# EAGLE board 010 (EAGLE 9.6.2), part 1 of 2
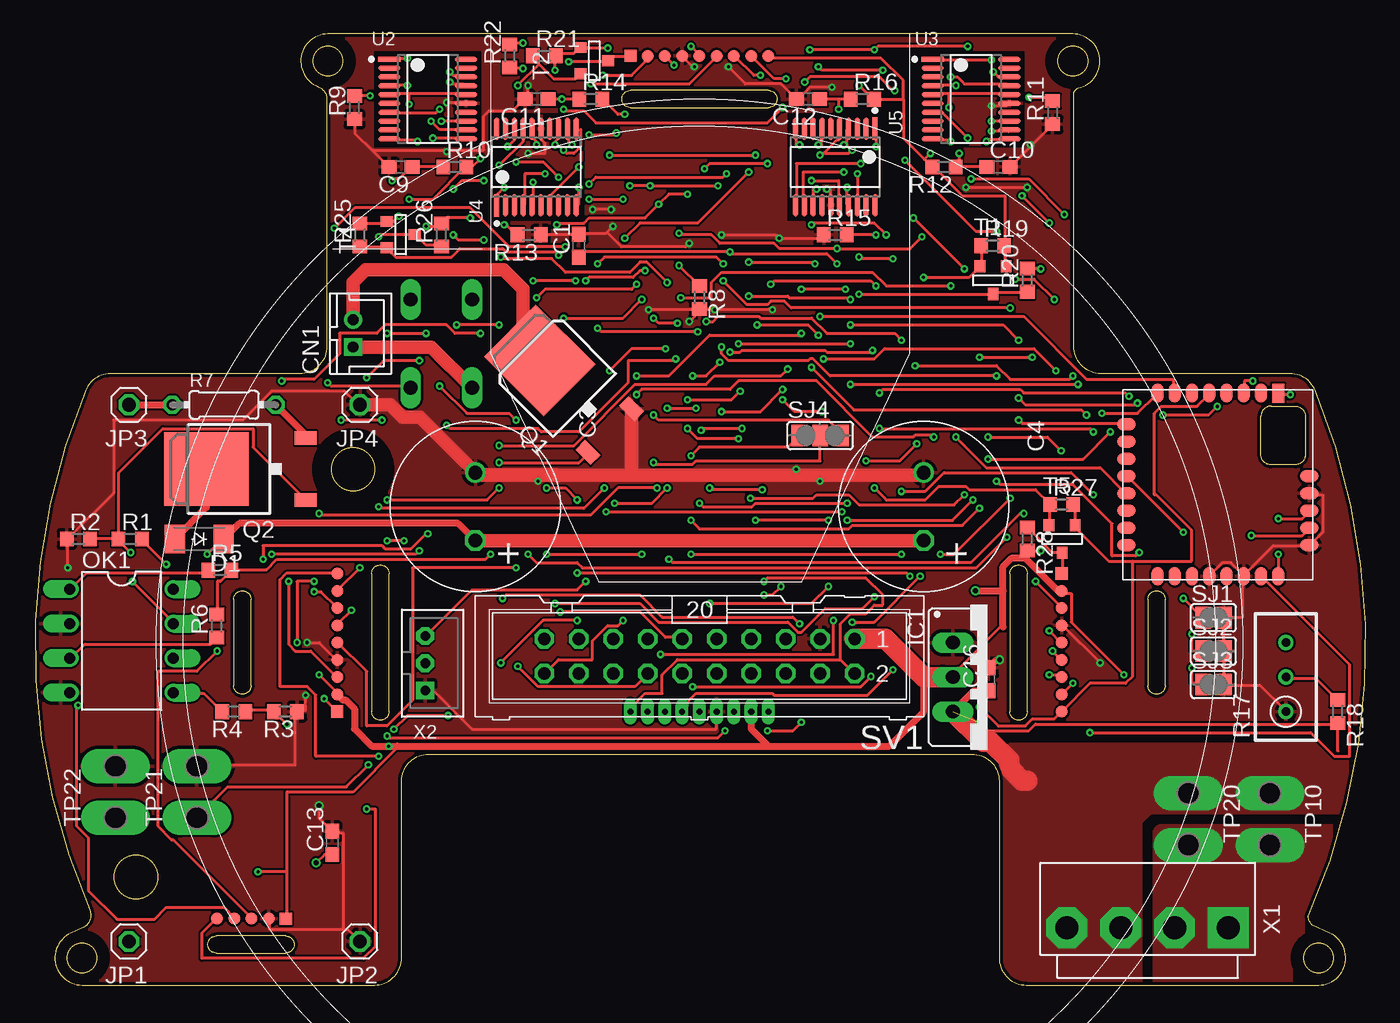
[diagram p0: board, top side]
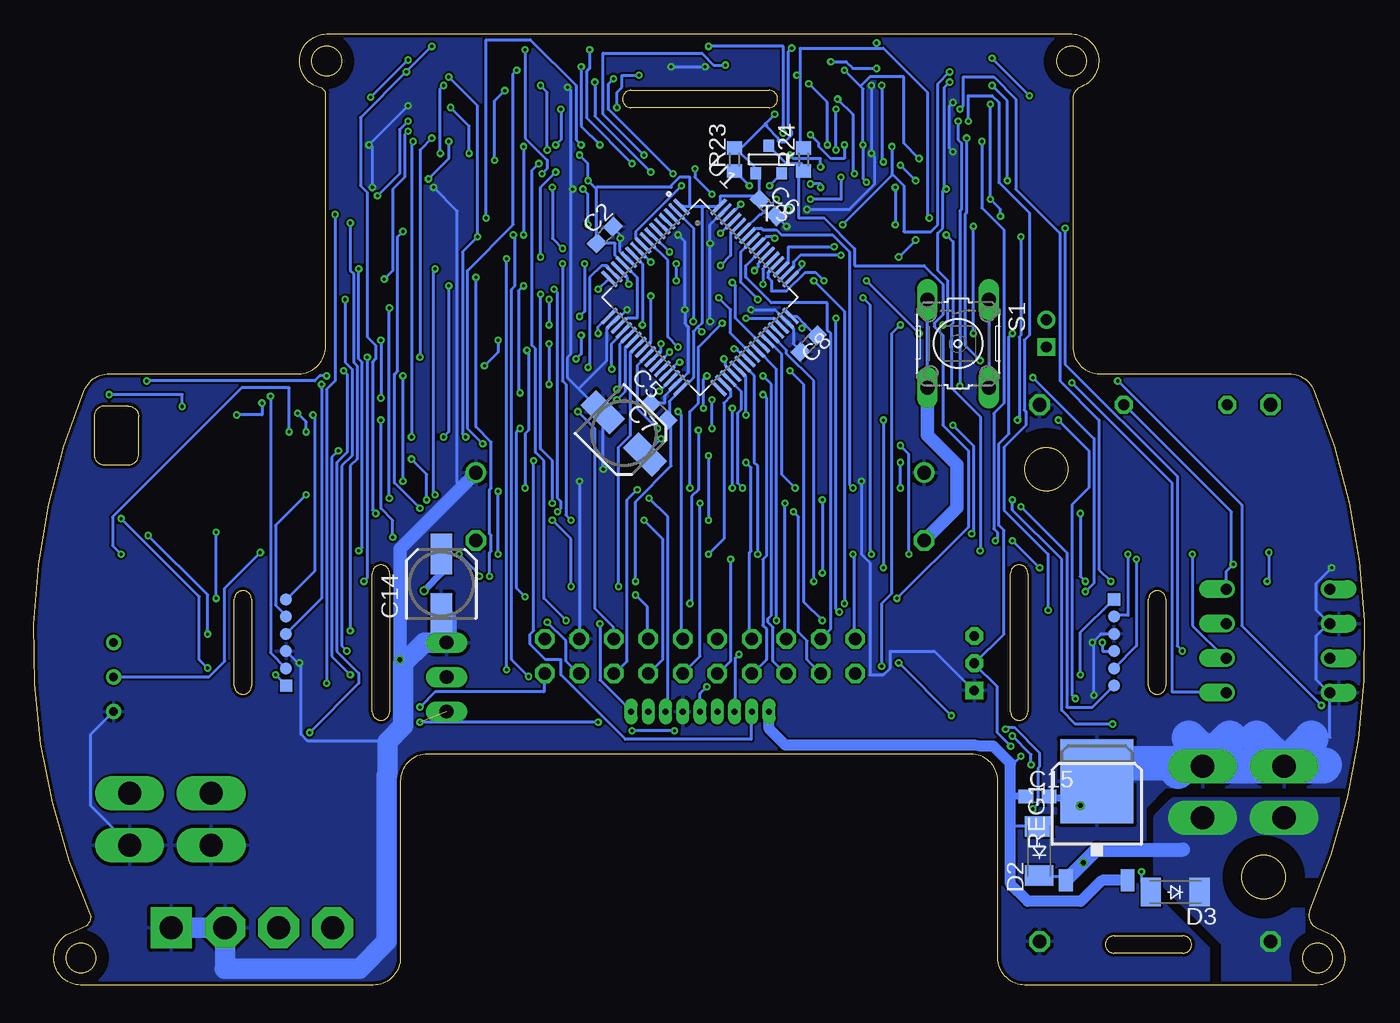
[diagram p1: board, bottom side, seen from below]

Size 97.94 x 70 mm. Coordinates in mm from the lower left corner, seen from the top.
Outline: 83.19,22.03 arc-180 81.92,22.03
Outline: 81.92,28.38 arc-180 83.19,28.38
Outline: 83.19,22.03 arc-180 81.92,22.03
Outline: 81.92,28.38 arc-180 83.19,28.38
Outline: 83.19,22.03 arc-180 81.92,22.03
Outline: 81.92,28.38 arc-180 83.19,28.38
Outline: 83.19,22.03 83.19,28.38
Outline: 81.92,28.38 81.92,22.03
Outline: 14.61,28.38 arc-180 15.88,28.38
Outline: 15.88,22.03 arc-180 14.61,22.03
Outline: 14.61,28.38 arc-180 15.88,28.38
Outline: 15.88,22.03 arc-180 14.61,22.03
Outline: 14.61,28.38 arc-180 15.88,28.38
Outline: 15.88,22.03 arc-180 14.61,22.03
Outline: 14.61,28.38 14.61,22.03
Outline: 15.88,22.03 15.88,28.38
Outline: 76.47,65.7 arc-27 76.79,66.04 arc168 76.39,70 21.54,70 arc159 20.83,66.13 arc-69 21.47,65.2 21.47,47 arc-90 19.47,45 5.55,45 arc67 3.7,43.77 arc46 4,5.53 arc-89 3.5,4.22 2.62,3.82 arc155 3.45,0 24.97,0 arc90 26.97,2 26.97,15 arc-90 28.97,17 68.97,17 arc-90 70.97,15 70.97,2 arc90 72.97,0 94.49,0 arc155 95.32,3.82 94.03,4.41 arc-41 93.72,5.05 arc47 94.23,43.77 arc67 92.38,45 78.47,45 arc-90 76.47,47 76.47,65.7
Outline: 71.76,30.29 71.76,20.13 arc180 73.03,20.13 73.03,30.29 arc180 71.76,30.29
Outline: 24.77,30.29 24.77,20.13 arc180 26.04,20.13 26.04,30.29 arc180 24.77,30.29
Outline: 43.82,64.58 53.98,64.58 arc180 53.98,65.85 43.82,65.85 arc180 43.82,64.58
Outline: 13.34,2.35 18.42,2.35 arc180 18.42,3.62 13.34,3.62 arc180 13.34,2.35
Outline: circle at 94.49,2 radius 1.1
Outline: circle at 21.54,68 radius 1.1
Outline: circle at 23.4,37.96 radius 1.6
Outline: circle at 7.4,7.96 radius 1.6
Outline: circle at 7.4,7.96 radius 1.6
Outline: circle at 3.45,2 radius 1.1
Outline: circle at 76.39,68 radius 1.1
Copper layers (1*16): Top 0.035mm / dielectric 1.5mm / Bottom 0.035mm
Design rules "SeeedStudio_2layer_DRU_no_angle_20140221 *": minimum track width 6mil, minimum drill 9mil, track to track 6mil, track to pad 6mil, pad to pad 6mil, via to via 6mil, smd to smd 0mil, copper to edge 10mil, drill to drill 10mil, minimum pad ring 10mil, minimum via ring 6mil, stop-mask expansion 2mil, vias tented up to drill 100mil, thermal gap 10mil
Net classes: 0 default: width 0.203 mm
tRestrict: area 1.4,0 to 5.4,4; area 20.4,35 to 26.4,41; area 4.4,5 to 10.4,11; area 92.5,0 to 96.5,4; area 74.4,66 to 78.4,70; area 19.5,66 to 23.5,70
bRestrict: area 74.4,66 to 78.4,70; area 20.4,35 to 26.4,41; area 4.4,5 to 10.4,11; area 1.4,0 to 5.4,4; area 92.5,0 to 96.5,4; area 19.5,66 to 23.5,70

## Footprints (pad centres in the part's own frame; a part is rotated, then mirrored left to right if it is on the bottom)
C1608 = smd 1.1 x 1: 1 -0.85,0; 2 0.85,0
C12.5 = drill 1: P$1 -2.5,0 | drill 1 octagon: P$2 2.5,0
SANYO-OSCON_SMD_B6 = smd 3 x 1.6: + 2.2,0; - -2.2,0
B2B-PH-K-S = drill 0.8 square: 1 -1,0 | drill 0.8: 2 1,0
SOD-123_MINI-SMA = smd 1.5 x 2.1: A 1.8,0; C -1.8,0
TO220S = drill 1.016 long: 1 -2.54,-2.54; 2 0,-2.54; 3 2.54,-2.54
1X01 = drill 1.016 octagon: 1 0,0
PINHEAD-1.27_1X02 = drill 0.45 long: 1 -1.27,0; 2 0,0
DIL08 = drill 0.813 offset: 1 -3.81,-3.81; 2 -1.27,-3.81; 3 1.27,-3.81; 4 3.81,-3.81; 5 3.81,3.81; 6 1.27,3.81; 7 -1.27,3.81; 8 -3.81,3.81
D-PAK_TO252AA = smd 1 x 1.6: 1 -2.28,-4.8; 3 2.28,-4.8 | smd 5.4 x 6.2: 4 0,2.5
TO252 = smd 1 x 1.6: 1 -2.28,-4.8; 2 2.28,-4.8 | smd 5.4 x 6.2: 3 0,2.5
R0603 = smd 1 x 1.1: 1 -0.85,0; 2 0.85,0
0204/7 = drill 0.813 octagon: 1 -3.81,0; 2 3.81,0
RTRIM3296W = drill 0.61: 1 0,-2.54; 2 0,0; 3 0,2.54
MYPARTS_D-PAK_TO252AA = smd 1 x 1.6: 1 -2.28,-4.8; 3 2.28,-4.8 | smd 5.4 x 6.2: 4 0,2.5
B3F-10XX = drill 1.016 long: 1 -3.251,2.261; 2 3.251,2.261; 3 -3.251,-2.261; 4 3.251,-2.261
SJ = smd 1.168 x 1.6: 1 -0.762,0; 2 0.762,0
SJ_2 = smd 1.168 x 1.6: 1 -1.524,0; 2 0,0; 3 1.524,0
ML20 = drill 0.914 octagon: 1 -11.43,-1.27; 2 -11.43,1.27; 3 -8.89,-1.27; 4 -8.89,1.27; 5 -6.35,-1.27; 6 -6.35,1.27; 7 -3.81,-1.27; 8 -3.81,1.27; 9 -1.27,-1.27; 10 -1.27,1.27; 11 1.27,-1.27; 12 1.27,1.27; 13 3.81,-1.27; 14 3.81,1.27; 15 6.35,-1.27; 16 6.35,1.27; 17 8.89,-1.27; 18 8.89,1.27; 19 11.43,-1.27; 20 11.43,1.27
SOT-23 = smd 0.787 x 0.889: 1 0.025,-1.016; 2 -0.94,1.016; 3 0.991,1.016
TP09SQ = smd 0.9 x 0.9: TP 0,0
TP09R = smd 0.9 x 0.9: TP 0,0
P2-38-17 = drill 1.702 pad 2.121 long: TP-1 -1.905,0; TP-2 1.905,0
QFP50P1200X1200X160-64N = smd 1.56 x 0.28: 1 -5.68,3.75; 2 -5.68,3.25; 3 -5.68,2.75; 4 -5.68,2.25; 5 -5.68,1.75; 6 -5.68,1.25; 7 -5.68,0.75; 8 -5.68,0.25; 9 -5.68,-0.25; 10 -5.68,-0.75; 11 -5.68,-1.25; 12 -5.68,-1.75; 13 -5.68,-2.25; 14 -5.68,-2.75; 15 -5.68,-3.25; 16 -5.68,-3.75; 33 5.68,-3.75; 34 5.68,-3.25; 35 5.68,-2.75; 36 5.68,-2.25; 37 5.68,-1.75; 38 5.68,-1.25; 39 5.68,-0.75; 40 5.68,-0.25; 41 5.68,0.25; 42 5.68,0.75; 43 5.68,1.25; 44 5.68,1.75; 45 5.68,2.25; 46 5.68,2.75; 47 5.68,3.25; 48 5.68,3.75 | smd 0.28 x 1.56: 17 -3.75,-5.68; 18 -3.25,-5.68; 19 -2.75,-5.68; 20 -2.25,-5.68; 21 -1.75,-5.68; 22 -1.25,-5.68; 23 -0.75,-5.68; 24 -0.25,-5.68; 25 0.25,-5.68; 26 0.75,-5.68; 27 1.25,-5.68; 28 1.75,-5.68; 29 2.25,-5.68; 30 2.75,-5.68; 31 3.25,-5.68; 32 3.75,-5.68; 49 3.75,5.68; 50 3.25,5.68; 51 2.75,5.68; 52 2.25,5.68; 53 1.75,5.68; 54 1.25,5.68; 55 0.75,5.68; 56 0.25,5.68; 57 -0.25,5.68; 58 -0.75,5.68; 59 -1.25,5.68; 60 -1.75,5.68; 61 -2.25,5.68; 62 -2.75,5.68; 63 -3.25,5.68; 64 -3.75,5.68
STMICROELECTRONICS_STM32L010F4P6_2 = smd 1.655 x 0.381: 1 -2.825,2.925; 2 -2.825,2.275; 3 -2.825,1.625; 4 -2.825,0.975; 5 -2.825,0.325; 6 -2.825,-0.325; 7 -2.825,-0.975; 8 -2.825,-1.625; 9 -2.825,-2.275; 10 -2.825,-2.925; 11 2.825,-2.925; 12 2.825,-2.275; 13 2.825,-1.625; 14 2.825,-0.975; 15 2.825,-0.325; 16 2.825,0.325; 17 2.825,0.975; 18 2.825,1.625; 19 2.825,2.275; 20 2.825,2.925
LITE = smd 1.4 x 0.9: P$1 0.25,11.43; P$2 0.25,10.16; P$3 0.25,8.89; P$4 0.25,7.62; P$5 0.25,6.35; P$6 0.25,5.08; P$7 0.25,3.81; P$8 0.25,2.54; P$17 13.72,2.54; P$18 13.72,3.81; P$19 13.72,5.08; P$20 13.72,6.35; P$21 13.72,7.62; P$22 13.72,8.89; P$23 13.72,10.16; P$24 13.72,11.43 | smd 0.9 x 1.4: P$9 2.54,0.25; P$10 3.81,0.25; P$11 5.08,0.25; P$12 6.35,0.25; P$13 7.62,0.25; P$14 8.89,0.25; P$15 10.16,0.25; P$16 11.43,0.25; P$25 11.43,13.72; P$26 10.16,13.72; P$27 8.89,13.72; P$28 7.62,13.72; P$29 6.35,13.72
PINHEAD-1.27_1X05 = drill 0.45 long: P$1 0,0; P$2 1.27,0; P$3 2.54,0; P$4 3.81,0; P$5 5.08,0
B4P-VH = drill 1.7 pad 3 square: 1 -5.94,0 | drill 1.7 pad 3 octagon: 2 -1.98,0; 3 1.98,0; 4 5.94,0
B3B-PH-K-S = drill 0.7 pad 1.3 square: 1 2,0 | drill 0.7 pad 1.3 octagon: 2 0,0; 3 -2,0

## Placement (x,y rotation side)
C1  0.1μ  [C1608]  40.01,54.42 90 top
C2  0.1μ  [C1608]  55.9,55.21 45 bottom
C3  1000μ  [C12.5]  32.4,35.21 270 top
C4  1000μ  [C12.5]  65.4,35.21 270 top
C5  4.7μ  [SANYO-OSCON_SMD_B6]  54.5,40.61 315 bottom
C6  0.1μ  [C1608]  43.9,57.21 315 bottom
C7  0.1μ  [C1608]  51.9,42.21 135 bottom
C8  0.1μ  [C1608]  40.9,47.21 225 bottom
C9  0.1μ  [C1608]  26.9,60.21 180 top
C10  0.1μ  [C1608]  70.9,60.21 0 top
C11  0.1μ  [C1608]  36.9,65.21 180 top
C12  0.1μ  [C1608]  56.9,65.21 180 top
C13  0.1μ  [C1608]  21.87,10.46 90 top
C14  4.7μ  [SANYO-OSCON_SMD_B6]  67.95,29.52 90 bottom
C15  2.2μ  [C1608]  24.05,13.89 0 bottom
C16  0.1μ  [C1608]  70.19,22.5 90 top
CN1  [B2B-PH-K-S]  23.4,47.96 90 top
D1  CGRM4001-G  [SOD-123_MINI-SMA]  12.07,32.83 180 top
D2  CGRM4001-G  [SOD-123_MINI-SMA]  23.93,9.87 90 bottom
D3  CGRM4001-G  [SOD-123_MINI-SMA]  13.91,6.84 180 bottom
IC1  [TO220S]  70.11,22.67 270 top
JP1  [1X01]  6.9,3.21 180 top
JP2  [1X01]  23.9,3.21 180 top
JP3  [1X01]  6.9,42.71 180 top
JP4  [1X01]  23.9,42.71 180 top
JP5  PINHEAD-1.27_1X02  [PINHEAD-1.27_1X02]  47.63,20.13 0 top
JP6  PINHEAD-1.27_1X02  [PINHEAD-1.27_1X02]  45.09,20.13 0 top
OK1  TLP621  [DIL08]  6.36,25.34 270 top
Q1  TO-252-NCH  [D-PAK_TO252AA]  38.9,44.21 45 top
Q2  TJ8S06M3L  [TO252]  15.1,37.98 90 top
R1  1k  [R0603]  6.99,32.83 0 top
R2  10k  [R0603]  3.18,32.83 0 top
R3  1k  [R0603]  18.42,20.13 180 top
R4  10k  [R0603]  14.61,20.13 180 top
R5  180  [R0603]  13.6,30.54 0 top
R6  180  [R0603]  13.36,26.43 90 top
R7  180  [0204/7]  13.9,42.71 0 top
R8  33k  [R0603]  48.9,50.61 270 top
R9  33k  [R0603]  23.5,64.58 90 top
R10  33k  [R0603]  30.9,60.21 0 top
R11  33k  [R0603]  74.9,64.21 90 top
R12  33k  [R0603]  66.9,60.21 180 top
R13  33k  [R0603]  36.36,55.21 180 top
R14  33k  [R0603]  40.9,65.21 0 top
R15  33k  [R0603]  58.9,55.21 0 top
R16  33k  [R0603]  60.9,65.21 0 top
R17  20k  [RTRIM3296W]  92.08,22.67 0 top
R18  33k  [R0603]  95.89,20.13 270 top
R19  33k  [R0603]  70.49,54.42 0 top
R20  33k  [R0603]  73.03,51.88 90 top
R21  33k  [R0603]  37.47,68.39 0 top
R22  33k  [R0603]  34.93,68.39 90 top
R23  33k  [R0603]  46.36,60.77 90 bottom
R24  33k  [R0603]  41.28,60.77 90 bottom
R25  33k  [R0603]  23.9,55.21 90 top
R26  33k  [R0603]  29.9,55.21 90 top
R27  33k  [R0603]  75.57,35.37 0 top
R28  33k  [R0603]  73.03,32.83 270 top
REG1  MYPARTS_NJM7800S-REGULATOR  [MYPARTS_D-PAK_TO252AA]  19.69,12.51 0 bottom
S1  [B3F-10XX]  29.9,47.21 270 bottom
SJ1  [SJ]  86.74,27.04 0 top
SJ2  [SJ]  86.74,24.58 0 top
SJ3  [SJ]  86.74,22.12 0 top
SJ4  [SJ_2]  57.79,40.45 0 top
SV1  [ML20]  48.9,24.21 180 top
T1  [SOT-23]  70.49,51.88 0 top
T2  [SOT-23]  41.15,68.01 90 top
T3  [SOT-23]  43.82,60.77 180 bottom
T4  [SOT-23]  26.9,55.21 90 top
T5  [SOT-23]  75.57,32.83 0 top
TP1  TPSTP09SQ  [TP09SQ]  75.57,30.29 0 top
TP2  TPSTP09R  [TP09R]  75.57,29.02 0 top
TP3  TPSTP09R  [TP09R]  75.57,27.75 0 top
TP4  TPSTP09R  [TP09R]  75.57,26.48 0 top
TP5  TPSTP09R  [TP09R]  75.57,25.21 0 top
TP6  TPSTP09R  [TP09R]  75.57,23.94 0 top
TP7  TPSTP09R  [TP09R]  75.57,22.67 0 top
TP8  TPSTP09R  [TP09R]  75.57,21.4 0 top
TP9  TPSTP09R  [TP09R]  75.57,20.13 0 top
TP10  PTR2  [P2-38-17]  90.9,12.21 270 top
TP11  TPSTP09SQ  [TP09SQ]  22.23,20.13 180 top
TP12  TPSTP09R  [TP09R]  22.23,21.4 180 top
TP13  TPSTP09R  [TP09R]  22.23,22.67 180 top
TP14  TPSTP09R  [TP09R]  22.23,23.94 180 top
TP15  TPSTP09R  [TP09R]  22.23,25.21 180 top
TP16  TPSTP09R  [TP09R]  22.23,26.48 180 top
TP17  TPSTP09R  [TP09R]  22.23,27.75 180 top
TP18  TPSTP09R  [TP09R]  22.23,29.02 180 top
TP19  TPSTP09R  [TP09R]  22.23,30.29 180 top
TP20  PTR2  [P2-38-17]  84.9,12.21 270 top
TP21  PTR2  [P2-38-17]  11.9,14.21 90 top
TP22  PTR2  [P2-38-17]  5.9,14.21 90 top
TP23  TPSTP09SQ  [TP09SQ]  18.46,4.89 270 top
TP24  TPSTP09R  [TP09R]  17.19,4.89 270 top
TP25  TPSTP09R  [TP09R]  15.92,4.89 270 top
TP26  TPSTP09R  [TP09R]  14.65,4.89 270 top
TP27  TPSTP09R  [TP09R]  13.38,4.89 270 top
TP28  TPSTP09SQ  [TP09SQ]  18.42,28.38 0 bottom
TP29  TPSTP09R  [TP09R]  18.42,27.11 0 bottom
TP30  TPSTP09R  [TP09R]  18.42,25.84 0 bottom
TP31  TPSTP09R  [TP09R]  18.42,24.57 0 bottom
TP32  TPSTP09SQ  [TP09SQ]  43.82,68.39 90 top
TP33  TPSTP09R  [TP09R]  45.09,68.39 90 top
TP34  TPSTP09R  [TP09R]  46.36,68.39 90 top
TP35  TPSTP09R  [TP09R]  47.63,68.39 90 top
TP36  TPSTP09R  [TP09R]  48.9,68.39 90 top
TP37  TPSTP09R  [TP09R]  50.17,68.39 90 top
TP38  TPSTP09R  [TP09R]  51.44,68.39 90 top
TP39  TPSTP09R  [TP09R]  52.71,68.39 90 top
TP40  TPSTP09R  [TP09R]  53.98,68.39 90 top
TP41  TPSTP09R  [TP09R]  18.42,23.3 0 bottom
TP42  TPSTP09R  [TP09R]  18.42,22.03 0 bottom
TP43  TPSTP09SQ  [TP09SQ]  79.38,22.03 180 bottom
TP44  TPSTP09R  [TP09R]  79.38,23.3 180 bottom
TP45  TPSTP09R  [TP09R]  79.38,24.57 180 bottom
TP46  TPSTP09R  [TP09R]  79.38,25.84 180 bottom
TP47  TPSTP09R  [TP09R]  79.38,27.11 180 bottom
TP48  TPSTP09R  [TP09R]  79.38,28.38 180 bottom
U1  STM32F446RET6  [QFP50P1200X1200X160-64N]  48.9,50.61 315 bottom
U2  STMICROELECTRONICS_STM32L010F4P6STMICROELECTRONICS_STM32L010F4P6_0_2  [STMICROELECTRONICS_STM32L010F4P6_2]  28.9,65.21 0 top
U3  STMICROELECTRONICS_STM32L010F4P6STMICROELECTRONICS_STM32L010F4P6_0_2  [STMICROELECTRONICS_STM32L010F4P6_2]  68.9,65.21 0 top
U4  STMICROELECTRONICS_STM32L010F4P6STMICROELECTRONICS_STM32L010F4P6_0_2  [STMICROELECTRONICS_STM32L010F4P6_2]  36.9,60.21 90 top
U5  STMICROELECTRONICS_STM32L010F4P6STMICROELECTRONICS_STM32L010F4P6_0_2  [STMICROELECTRONICS_STM32L010F4P6_2]  58.9,60.21 270 top
U$1  LITE  [LITE]  80.08,43.82 270 top
U$2  PINHEAD-1.27_1X05  [PINHEAD-1.27_1X05]  48.9,20.13 0 top
X1  B4P-VH  [B4P-VH]  81.9,4.21 180 top
X2  B3B-PH-K-S  [B3B-PH-K-S]  28.71,23.69 270 top

## Library data of the parts
C1 C2 C5-C16 = rcl; SPICEPREFIX: C
C3 C4 = myParts2
CN1 = jst-ph
D1-D3 = diode
IC1 = v-reg
JP1-JP4 = pinhead
JP5 JP6 REG1 U$2 = #001-line
OK1 = optocoupler; OC_FARNELL: unknown; OC_NEWARK: unknown
Q1 = Q
Q2 = transistor-fet
R1-R16 R18-R28 = rcl; SPICEPREFIX: R
R17 = rcl; SPICEMODEL: X; SPICEPREFIXL: POT
S1 = switch-omron; MPN: B3F-1000; OC_FARNELL: 176432; OC_NEWARK: 36M3542
SJ1-SJ4 = jumper
SV1 = con-ml; OC_FARNELL: unknown; OC_NEWARK: unknown
T1-T5 = zetex; OC_FARNELL: unknown; OC_NEWARK: unknown
TP1-TP48 = testpad
U1 = STM32F446RET6; DESCRIPTION: ARM® Cortex®-M4 STM32F4 Microcontroller IC 32-Bit 180MHz 512KB (512K x 8) FLASH 64-LQFP (10x10); DIGI-KEY_PART_NUMBER: 497-STM32F446RET6TR-ND; MF: STMicroelectronics; MP: STM32F446RET6; PACKAGE: LQFP-64 STMicroelectronics; PURCHASE-URL: https://pricing.snapeda.com/search/part/STM32F446RET6/?ref=eda
U2-U5 = STMicroelectronics - STM32L010F4P6; AMBIENT_TEMPERATURE_RANGE_HIGH: +85°C; AMBIENT_TEMPERATURE_RANGE_LOW: -40°C; AUTOMOTIVE: No; CENTROID_NOT_SPECIFIED: No; CORE_ARCHITECTURE: Arm Cortex-M0+; DATASHEET: https://www.st.com/resource/en/datasheet/stm32l010f4.pdf; DATA_BUS_WIDTH: 32bits; DEVICE_CLASS_L1: Integrated Circuits (ICs); DEVICE_CLASS_L2: Embedded Processors and Controllers; DEVICE_CLASS_L3: Microcontrollers; DIGIKEY_DESCRIPTION: IC 16/32-BITS MICROS; DIGIKEY_PART_NUMBER: 497-19364-ND; FOOTPRINT_PARAMETERS_1: {"fp_type":"TSSOP2","params":{"N":{"nom":20,"long name":"Number of leads","min":null,"max":null,"short name":"N","type":"count"},"A":{"nom":false,"long name":"Height","min":false,"max":1200000,"short name":"A","type":"measurement"},"A1":{"nom":false,"long name":"Package clearance","min":50000,"max":150000,"short name":"A1","type":"measurement"},"A2":{"nom":1000000,"long name":"Package height","min":800000,"max":1050000,"short name":"A2","type":"measurement"},"D":{"nom":6500000,"long name":"Package length","min":6400000,"max":6600000,"short name":"D","type":"measurement"},"E":{"nom":6400000,"long name":"Width /w leads","min":6200000,"max":6600000,"short name":"E","type":"measurement"},"E1":{"nom":4400000,"long name":"Package width","min":4300000,"max":4500000,"short name":"E1","type":"measurement"},"B":{"nom":false,"long name":"Lead width","min":190000,"max":300000,"short name":"B","type":"measurement"},"C":{"nom":false,"long name":"Lead thickness","min":90000,"max":200000,"short name":"C","type":"measurement"},"L":{"nom":600000,"long name":"Lead foot length","min":450000,"max":750000,"short name":"L","type":"measurement"},"e":{"nom":650000,"long name":"Lead pitch","min":null,"max":null,"short name":"e","type":"measurement"},"PHI":{"nom":false,"long name":"Lead angle","min":0,"max":8000000,"short name":"PHI","type":"measurement"},"HT":{"default":"No","long name":"Thermal pad","type":"multichoiceparent","short name":"HT","children":[]},"offset x":{"nom":0,"long name":"X Center offset","min":null,"max":null,"short name":"offset x","type":"measurement"},"offset y":{"nom":0,"long name":"Y Center offset","min":null,"max":null,"short name":"offset y","type":"measurement"},"LS":{"default":"Rounded rectangle","long name":"Land shape","type":"multichoice","short name":"LS"},"LS1":{"default":"Rectangle","long name":"Land shape (Pin 1)","type":"multichoice","short name":"LS1"},"solder toe":{"nom":550000,"long name":"Solder fillet (toe)","min":null,"max":null,"short name":"solder toe","type":"fixedmeasurement"},"solder heel":{"nom":450000,"long name":"Solder fillet (heel)","min":null,"max":null,"short name":"solder heel","type":"fixedmeasurement"},"solder side":{"nom":50000,"long name":"Solder fillet (side)","min":null,"max":null,"short name":"solder side","type":"fixedmeasurement"},"courtyard":{"nom":500000,"long name":"Courtyard","min":null,"max":null,"short name":"courtyard","type":"fixedmeasurement"},"SF":{"default":"A (> 0.625mm pitch)","long name":"Packing level","type":"multichoiceparent","short name":"SF","help":"http://support.upverter.com/customer/portal/articles/978783-what-is-a-footprint-packing-level","children":["solder toe","solder heel","solder side","courtyard"]}}}; FOOTPRINT_PARAMETERS_2: {"fp_type":"TSSOP2","params":{"N":{"nom":20,"long name":"Number of leads","min":null,"max":null,"short name":"N","type":"count"},"A":{"nom":false,"long name":"Height","min":false,"max":1200000,"short name":"A","type":"measurement"},"A1":{"nom":false,"long name":"Package clearance","min":50000,"max":150000,"short name":"A1","type":"measurement"},"A2":{"nom":1000000,"long name":"Package height","min":800000,"max":1050000,"short name":"A2","type":"measurement"},"D":{"nom":6500000,"long name":"Package length","min":6400000,"max":6600000,"short name":"D","type":"measurement"},"E":{"nom":6400000,"long name":"Width /w leads","min":6200000,"max":6600000,"short name":"E","type":"measurement"},"E1":{"nom":4400000,"long name":"Package width","min":4300000,"max":4500000,"short name":"E1","type":"measurement"},"B":{"nom":false,"long name":"Lead width","min":190000,"max":300000,"short name":"B","type":"measurement"},"C":{"nom":false,"long name":"Lead thickness","min":90000,"max":200000,"short name":"C","type":"measurement"},"L":{"nom":600000,"long name":"Lead foot length","min":450000,"max":750000,"short name":"L","type":"measurement"},"e":{"nom":650000,"long name":"Lead pitch","min":null,"max":null,"short name":"e","type":"measurement"},"PHI":{"nom":false,"long name":"Lead angle","min":0,"max":8000000,"short name":"PHI","type":"measurement"},"HT":{"default":"No","long name":"Thermal pad","type":"multichoiceparent","short name":"HT","children":[]},"offset x":{"nom":0,"long name":"X Center offset","min":null,"max":null,"short name":"offset x","type":"measurement"},"offset y":{"nom":0,"long name":"Y Center offset","min":null,"max":null,"short name":"offset y","type":"measurement"},"LS":{"default":"Rounded rectangle","long name":"Land shape","type":"multichoice","short name":"LS"},"LS1":{"default":"Rectangle","long name":"Land shape (Pin 1)","type":"multichoice","short name":"LS1"},"solder toe":{"nom":350000,"long name":"Solder fillet (toe)","min":null,"max":null,"short name":"solder toe","type":"fixedmeasurement"},"solder heel":{"nom":350000,"long name":"Solder fillet (heel)","min":null,"max":null,"short name":"solder heel","type":"fixedmeasurement"},"solder side":{"nom":30000,"long name":"Solder fillet (side)","min":null,"max":null,"short name":"solder side","type":"fixedmeasurement"},"courtyard":{"nom":250000,"long name":"Courtyard","min":null,"max":null,"short name":"courtyard","type":"fixedmeasurement"},"SF":{"default":"B (> 0.625mm pitch)","long name":"Packing level","type":"multichoiceparent","short name":"SF","help":"http://support.upverter.com/customer/portal/articles/978783-what-is-a-footprint-packing-level","children":["solder toe","solder heel","solder side","courtyard"]}}}; FOOTPRINT_PARAMETERS_3: {"fp_type":"TSSOP2","params":{"N":{"nom":20,"long name":"Number of leads","min":null,"max":null,"short name":"N","type":"count"},"A":{"nom":false,"long name":"Height","min":false,"max":1200000,"short name":"A","type":"measurement"},"A1":{"nom":false,"long name":"Package clearance","min":50000,"max":150000,"short name":"A1","type":"measurement"},"A2":{"nom":1000000,"long name":"Package height","min":800000,"max":1050000,"short name":"A2","type":"measurement"},"D":{"nom":6500000,"long name":"Package length","min":6400000,"max":6600000,"short name":"D","type":"measurement"},"E":{"nom":6400000,"long name":"Width /w leads","min":6200000,"max":6600000,"short name":"E","type":"measurement"},"E1":{"nom":4400000,"long name":"Package width","min":4300000,"max":4500000,"short name":"E1","type":"measurement"},"B":{"nom":false,"long name":"Lead width","min":190000,"max":300000,"short name":"B","type":"measurement"},"C":{"nom":false,"long name":"Lead thickness","min":90000,"max":200000,"short name":"C","type":"measurement"},"L":{"nom":600000,"long name":"Lead foot length","min":450000,"max":750000,"short name":"L","type":"measurement"},"e":{"nom":650000,"long name":"Lead pitch","min":null,"max":null,"short name":"e","type":"measurement"},"PHI":{"nom":false,"long name":"Lead angle","min":0,"max":8000000,"short name":"PHI","type":"measurement"},"HT":{"default":"No","long name":"Thermal pad","type":"multichoiceparent","short name":"HT","children":[]},"offset x":{"nom":0,"long name":"X Center offset","min":null,"max":null,"short name":"offset x","type":"measurement"},"offset y":{"nom":0,"long name":"Y Center offset","min":null,"max":null,"short name":"offset y","type":"measurement"},"LS":{"default":"Rounded rectangle","long name":"Land shape","type":"multichoice","short name":"LS"},"LS1":{"default":"Rectangle","long name":"Land shape (Pin 1)","type":"multichoice","short name":"LS1"},"solder toe":{"nom":150000,"long name":"Solder fillet (toe)","min":null,"max":null,"short name":"solder toe","type":"fixedmeasurement"},"solder heel":{"nom":250000,"long name":"Solder fillet (heel)","min":null,"max":null,"short name":"solder heel","type":"fixedmeasurement"},"solder side":{"nom":10000,"long name":"Solder fillet (side)","min":null,"max":null,"short name":"solder side","type":"fixedmeasurement"},"courtyard":{"nom":100000,"long name":"Courtyard","min":null,"max":null,"short name":"courtyard","type":"fixedmeasurement"},"SF":{"default":"C (> 0.625mm pitch)","long name":"Packing level","type":"multichoiceparent","short name":"SF","help":"http://support.upverter.com/customer/portal/articles/978783-what-is-a-footprint-packing-level","children":["solder toe","solder heel","solder side","courtyard"]}}}; FOOTPRINT_VARIANT_NAME_0: Recommended_Land_Pattern; FOOTPRINT_VARIANT_NAME_1: IPC_A; FOOTPRINT_VARIANT_NAME_2: IPC_B; FOOTPRINT_VARIANT_NAME_3: IPC_C; FREQUENCY: 32MHz; HEIGHT: 1.2mm; INTERFACE: I2C,SPI,UART,USART,SMBus,Other; IPC_LAND_PATTERN_NAME: SOP65P640X120-20; LEAD_FREE: Yes; MAX_JUNCTION_TEMP: +105°C; MAX_SUPPLY_VOLTAGE: 3.6V; MEMORY_SIZE: 16KBytes; MEMORY_TYPE: FLASH; MF: STMicroelectronics; MFG_PACKAGE_IDENT: TSSOP20-YA; MFG_PACKAGE_IDENT_DATE: 0; MFG_PACKAGE_IDENT_REV: 3; MIN_SUPPLY_VOLTAGE: 1.8V; MOUSER_DESCRIPTION: Cortex M0+ 16K TSSOP20 85°C; MOUSER_PART_NUMBER: 511-STM32L010F4P6; MPN: STM32L010F4P6; NUMBER_OF_A/D_CONVERTERS: 1; NUMBER_OF_ADC_CHANNELS: 7; NUMBER_OF_CORES: 1; NUMBER_OF_I/OS: 16; NUMBER_OF_I2C_CHANNELS: 1; NUMBER_OF_SPI_CHANNELS: 1; NUMBER_OF_TIMERS/COUNTERS: 7; NUMBER_OF_UART_CHANNELS: 1; PACKAGE: TSSOP20; PREFIX: U; RAM_SIZE: 2KBytes; ROHS: Yes; STANDOFF_HEIGHT: 0.05mm; TEMPERATURE_RANGE_HIGH: +105°C; TEMPERATURE_RANGE_LOW: -40°C; VERIFICATION_VERSION: 0.0.0.3
U$1 = TWELite
X1 = con-JST VH
X2 = con-JST PH

## Nets
!RESET-BALL: SV1.15 U1.29
+3V3: C2.1 C6.1 C7.1 C8.1 C15.1 D2.A JP6.1 R10.2 R12.2 R14.2 R16.2 R19.2 R21.2 R23.2 R25.2 R27.2 REG1.3 SV1.2 T1.3 T2.3 T3.3 T4.3 T5.3 TP9.TP TP19.TP TP40.TP U1.1 U1.13 U1.19 U1.32 U1.48 U1.64 U2.5 U2.16 U3.5 U3.16 U4.5 U4.16 U5.5 U5.16 U$1.P$5
+5V: C14.+ D3.A IC1.2 R20.2 R22.2 R24.2 R26.2 R28.2 SV1.1 TP2.TP TP12.TP TP23.TP TP28.TP TP33.TP TP43.TP U$2.P$4 X2.2
+12V: C13.1 C16.1 D2.C D3.C IC1.3 JP1.1 R18.2 REG1.1 TP10.TP-1 TP20.TP-1 TP21.TP-1 TP22.TP-1 X1.3 X1.4
+24V: JP3.1 R7.1
CAM-UTIL: SJ4.2 SV1.13
DRIBBLER: U1.44 X2.3
ESC-L-EMG1: TP46.TP U1.26
ESC-L-EMG2: TP47.TP U1.34
ESC-L-RX: TP48.TP U1.15
ESC-L-TX: TP44.TP U1.14
ESC-R-EMG1: TP31.TP U1.35
ESC-R-EMG2: TP41.TP U1.36
ESC-R-RX: TP42.TP U1.43
ESC-R-TX: TP29.TP U1.42
GND: C1.2 C2.2 C3.P$1 C4.P$1 C5.- C6.2 C7.2 C8.2 C9.2 C10.2 C11.2 C12.2 C13.2 C14.- C15.2 C16.2 IC1.1 JP2.1 JP4.1 OK1.2 OK1.4 Q1.3 R2.1 R3.1 R8.2 R9.1 R11.1 R13.1 R15.1 R17.1 REG1.4 SJ1.2 SJ2.2 SJ3.2 SV1.3 TP4.TP TP10.TP-2 TP14.TP TP20.TP-2 TP21.TP-2 TP22.TP-2 TP24.TP TP30.TP TP35.TP TP45.TP U1.12 U1.18 U1.31 U1.47 U1.63 U2.15 U3.15 U4.15 U5.15 U$1.P$20 U$1.P$22 U$1.P$25 U$1.P$28 U$2.P$2 X1.1 X1.2 X2.1
L010-NRST-B: C12.1 R16.1 U5.4
L010-NRST-F: C11.1 R14.1 U4.4
L010-NRST-L: C9.1 R10.1 U2.4
L010-NRST-R: C10.1 R12.1 U3.4
L010-SWCLK-B: U5.20
L010-SWCLK-F: U4.20
L010-SWCLK-L: U2.20
L010-SWCLK-R: U3.20
L010-SWDIO-B: U5.19
L010-SWDIO-F: U4.19
L010-SWDIO-L: U2.19
L010-SWDIO-R: U3.19
LED-B: R23.1 T3.2 U1.9
LED-B-5V: R24.1 T3.1 U$2.P$5
LED-F: R21.1 T2.2 U1.59
LED-F-5V: R22.1 T2.1 TP32.TP
LED-L: R25.1 T4.2 U1.50
LED-L-5V: R26.1 T4.1 TP11.TP
LED-R: R27.1 T5.2 U1.27
LED-R-5V: R28.1 T5.1 TP1.TP
MISO: SV1.5 U1.22
MOSI: SV1.7 U1.23
MUX-B: U5.7 U$2.P$3
MUX-F: TP34.TP U4.7
MUX-L: TP13.TP U2.7
MUX-R: TP3.TP U3.7
N$1: OK1.3 R6.1
N$2: OK1.1 R5.1
N$3: OK1.8 Q2.2 R1.2 R7.2
N$4: R8.1 U1.60
N$5: C5.+ U1.30
N$6: SJ1.1 U$1.P$12
N$7: SJ2.1 U$1.P$26
N$8: SJ3.1 U$1.P$27
N$9: R11.2 U3.1
N$10: R13.2 U4.1
N$11: R15.2 U5.1
N$12: D1.A Q2.3
N$13: OK1.7 Q2.1 R1.1 R2.2
N$14: R9.2 U2.1
N$16: C3.P$2 C4.P$2 CN1.1 D1.C OK1.6 S1.3 S1.4
N$17: CN1.2 Q1.4
N$18: Q1.1 R3.2 R4.1
N$19: OK1.5 R4.2 S1.1 S1.2
NEOPIXEL: R19.1 T1.2 U1.58
NEOPIXEL-5V: R20.1 SV1.10 T1.1
NRST: C1.1 SV1.8 U1.7
RADIO-IN1: U1.10 U$1.P$7
RADIO-IN2: U1.24 U$1.P$1
RADIO-IN3: U1.2 U$1.P$3
RADIO-OUT1: U1.11 U$1.P$23
RADIO-OUT2: U1.25 U$1.P$24
RADIO-OUT3: U1.40 U$1.P$13
RADIO-RX: U1.54 U$1.P$8
RADIO-TX: U1.53 U$1.P$9
RX-CAM: SV1.19 U1.38
RX-PC: SV1.16 U1.17
S0-B: JP6.2 U5.10
S0-F: TP39.TP U4.10
S0-L: TP18.TP U2.10
S0-R: TP8.TP U3.10
S1-B: JP5.1 U5.11
S1-F: TP38.TP U4.11
S1-L: TP17.TP U2.11
S1-R: TP7.TP U3.11
S2-B: JP5.2 U5.12
S2-F: TP37.TP U4.12
S2-L: TP16.TP U2.12
S2-R: TP6.TP U3.12
S3-B: U5.13 U$2.P$1
S3-F: TP36.TP U4.13
S3-L: TP15.TP U2.13
S3-R: TP5.TP U3.13
SCK: SV1.9 U1.21
SCL: SV1.14 U1.61 U2.17 U3.17 U4.17 U5.17
SDA: SV1.12 U1.62 U2.18 U3.18 U4.18 U5.18
SOLENOID: R5.2 R6.2 U1.20
SPK-BUSY: TP27.TP U1.39
SPK-RX: TP26.TP U1.52
SPK-TX: TP25.TP U1.51
SS1: SV1.11 U1.57
SS-CAM: SJ4.1 U1.56
SWCLK: SV1.4 U1.49
SWDIO: SV1.6 U1.46
SWO: SV1.17 U1.55
TX-CAM: SJ4.3 U1.37
TX-PC: SV1.18 U1.16
UI: SV1.20 U1.41
VOLTAGE: R17.2 R18.1 U1.8